# EAGLE board Jukebox (EAGLE 7.6.0)
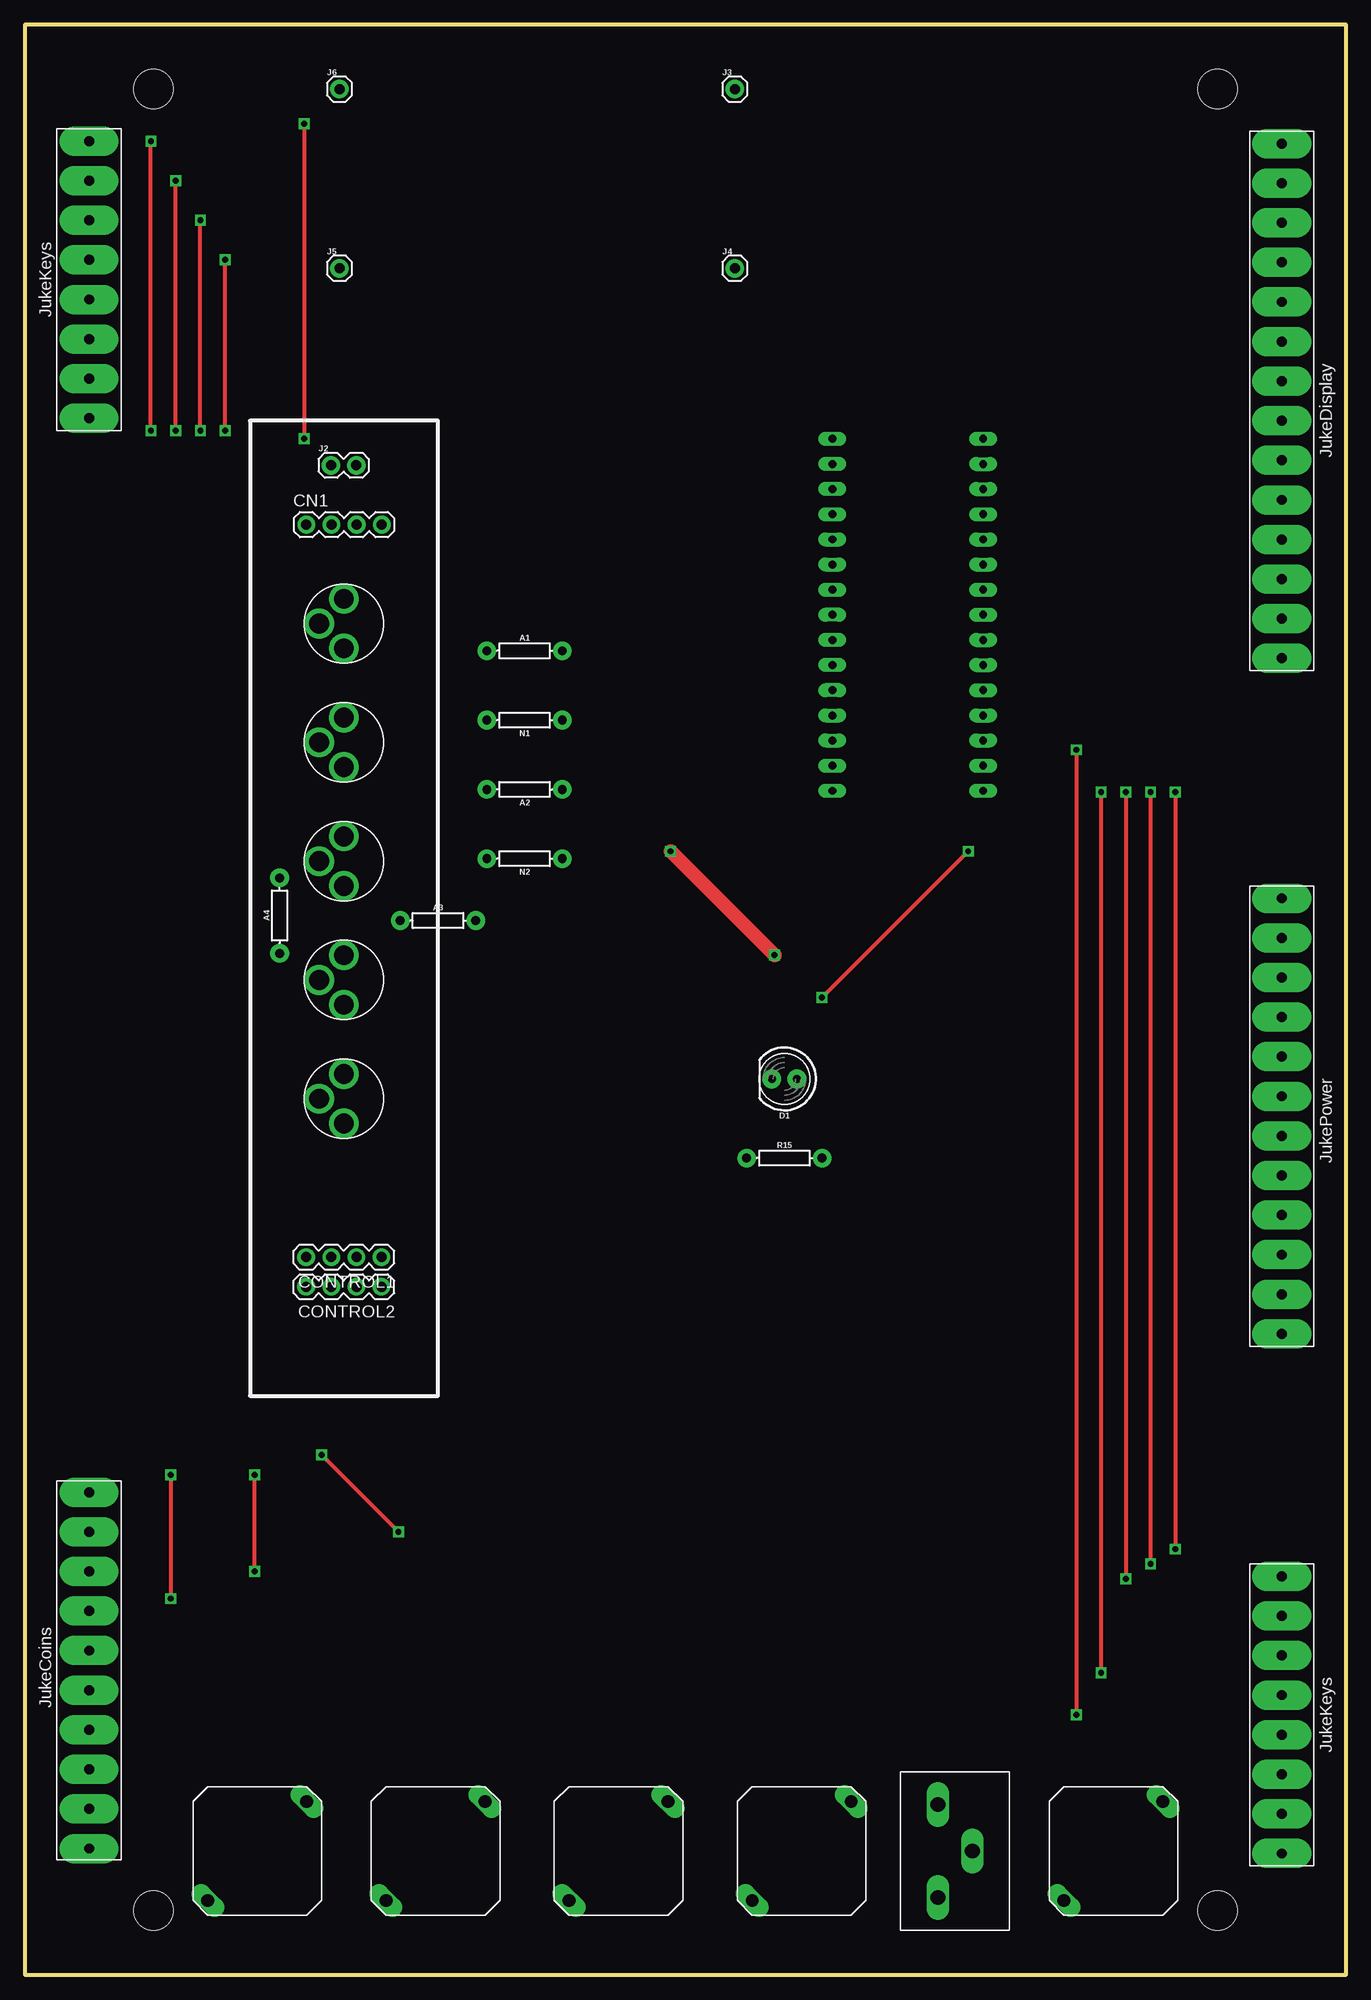
[diagram p0: board, top side]
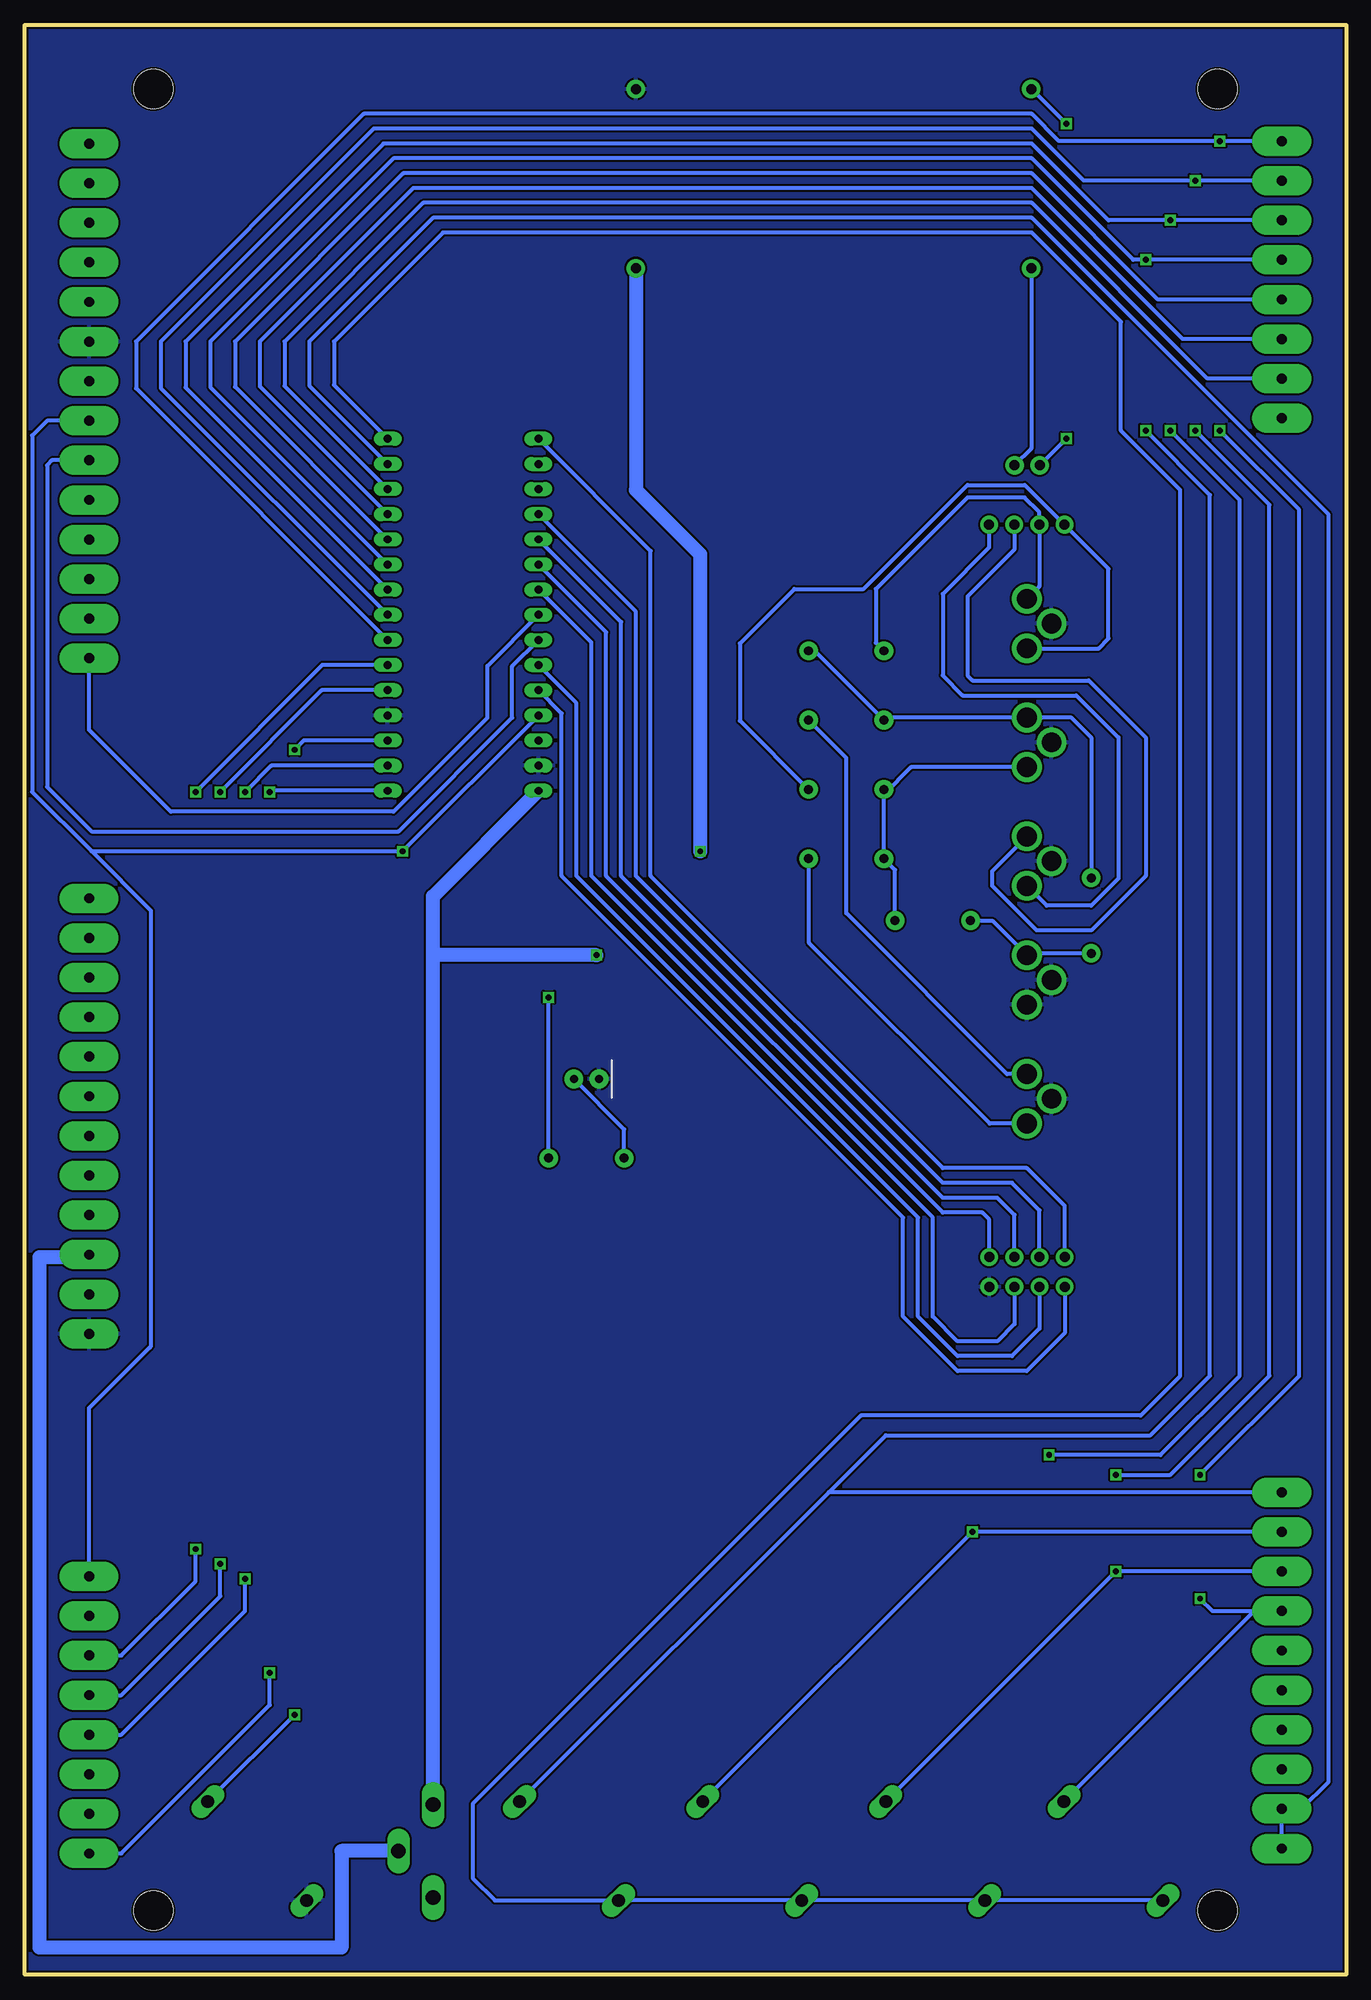
[diagram p1: board, bottom side, seen from below]

Size 133.5 x 197 mm. Coordinates in mm from the lower left corner, seen from the top.
Outline: 133.5,197 0,197 0,0 133.5,0 133.5,197
Copper layers (1*16): Top 0.035mm / dielectric 1.5mm / Bottom 0.035mm
Design rules "SparkFun": minimum track width 8mil, minimum drill 20mil, track to track 8mil, track to pad 8mil, pad to pad 8mil, via to via 8mil, smd to smd 8mil, copper to edge 8mil, drill to drill 8mil, minimum pad ring 12mil, minimum via ring 10mil, stop-mask expansion 4mil, vias tented up to drill 20mil, thermal gap 10mil
Holes 4 mm at 13,190.5 120.5,190.5 13,6.5 120.5,6.5

## Footprints (pad centres in the part's own frame; a part is rotated, then mirrored left to right if it is on the bottom)
AXIAL-0.3 = drill 0.9 pad 1.88: P$1 -3.81,0; P$2 3.81,0
JUKEHEADPHONE = drill 2 pad 3: 1 0,2.5; 2 2.5,0; 3 -2.5,0
1X04-BIG = drill 1.016 pad 1.778: 1 0,0; 2 2.54,0; 3 5.08,0; 4 7.62,0
LED_5MM = drill 0.813 pad 1.88: A -1.27,0; K 1.27,0
1X02 = drill 1.016 pad 1.88: 1 0,0; 2 2.54,0
1X01 = drill 1.016 pad 1.88: 1 0,0
NANO = drill 0.8 long: 3.3V -10.16,24.13; 5V -10.16,-1.27; A0 -10.16,19.05; A1 -10.16,16.51; A2 -10.16,13.97; A3 -10.16,11.43; A4 -10.16,8.89; A5 -10.16,6.35; A6 -10.16,3.81; A7 -10.16,1.27; AREF -10.16,21.59; D2 5.08,1.27; D3 5.08,3.81; D4 5.08,6.35; D5 5.08,8.89; D6 5.08,11.43; D7 5.08,13.97; D8 5.08,16.51; D9 5.08,19.05; D10 5.08,21.59; D11 5.08,24.13; D12 5.08,26.67; D13 -10.16,26.67; GND -10.16,-6.35; GND1 5.08,-1.27; RAW -10.16,-8.89; RST -10.16,-3.81; RST1 5.08,-3.81; RX1 5.08,-6.35; TX0 5.08,-8.89
10PINJUKE = drill 1 pad 3 long: 1 -18,0; 2 -14,0; 3 -10,0; 4 -6,0; 5 -2,0; 6 2,0; 7 6,0; 8 10,0; 9 14,0; 10 18,0
8PINJUKE = drill 1 pad 3 long: 1 -14,0; 2 -10,0; 3 -6,0; 4 -2,0; 5 2,0; 6 6,0; 7 10,0; 8 14,0
14PINJUKE = drill 1 pad 3 long: 1 -26,0; 2 -22,0; 3 -18,0; 4 -14,0; 5 -10,0; 6 -6,0; 7 -2,0; 8 2,0; 9 6,0; 10 10,0; 11 14,0; 12 18,0; 13 22,0; 14 26,0
12PINJUKE = drill 1 pad 3 long: 1 -22,0; 2 -18,0; 3 -14,0; 4 -10,0; 5 -6,0; 6 -2,0; 7 2,0; 8 6,0; 9 10,0; 10 14,0; 11 18,0; 12 22,0
JUKEBUTTON = drill 1.3 long: 1 -5,5; 2 5,-5
JUKESWITCH = drill 1.5 long: 1 -1.75,4.7; 2 -1.75,-4.7; 3 1.75,0

## Placement (x,y rotation side)
A1  1k  [AXIAL-0.3]  50.5,133.75 0 top
A2  1k  [AXIAL-0.3]  50.5,119.75 180 top
A3  1k  [AXIAL-0.3]  41.75,106.5 0 top
A4  1k  [AXIAL-0.3]  25.75,107 90 top
AUXIN  JUKEHEADPHONE  [JUKEHEADPHONE]  32.25,136.5 90 top
AUXOUT  JUKEHEADPHONE  [JUKEHEADPHONE]  32.25,124.5 90 top
CN1  1X4-BIG  [1X04-BIG]  28.45,146.5 0 top
CONTROL1  1X4-BIG  [1X04-BIG]  36.05,72.5 180 top
CONTROL2  1X4-BIG  [1X04-BIG]  36.05,69.5 180 top
D1  [LED_5MM]  76.75,90.5 180 top
FROMNEEDLE  JUKEHEADPHONE  [JUKEHEADPHONE]  32.25,88.5 90 top
J2  [1X02]  30.95,152.5 0 top
J3  [1X01]  71.75,190.5 0 top
J4  [1X01]  71.75,172.4 0 top
J5  [1X01]  31.8,172.4 0 top
J6  [1X01]  31.8,190.5 0 top
N1  1k  [AXIAL-0.3]  50.5,126.75 180 top
N2  1k  [AXIAL-0.3]  50.5,112.75 180 top
R15  10k  [AXIAL-0.3]  76.75,82.5 0 top
TOAMP  JUKEHEADPHONE  [JUKEHEADPHONE]  32.25,112.5 90 top
TOLIGHT  JUKEHEADPHONE  [JUKEHEADPHONE]  32.25,100.5 90 top
U$1  NANO  [NANO]  91.75,128.5 0 top
U$5  10PINJUKE  [10PINJUKE]  6.5,30.75 90 top
U$6  8PINJUKE  [8PINJUKE]  6.5,171.25 90 top
U$7  14PINJUKE  [14PINJUKE]  127,159 270 top
U$8  12PINJUKE  [12PINJUKE]  127,86.75 270 top
U$9  JUKEBUTTON  [JUKEBUTTON]  23.5,12.5 90 top
U$10  JUKEBUTTON  [JUKEBUTTON]  41.5,12.5 90 top
U$11  JUKEBUTTON  [JUKEBUTTON]  60,12.5 90 top
U$12  JUKEBUTTON  [JUKEBUTTON]  78.5,12.5 90 top
U$13  JUKEBUTTON  [JUKEBUTTON]  110,12.5 90 top
U$14  JUKESWITCH  [JUKESWITCH]  94,12.5 0 top
U$17  8PINJUKE2  [8PINJUKE]  127,26.25 270 top

## Library data of the parts
A1-A4 N1 N2 R15 = SparkFun-Resistors; PROD_ID: RES-12183
AUXIN AUXOUT FROMNEEDLE TOAMP TOLIGHT U$5-U$14 U$17 = Jukebox
CN1 CONTROL1 CONTROL2 = adafruit
D1 = SparkFun-LED
J2-J6 = SparkFun-Connectors
U$1 = Arduino-clone

## Nets
GND: AUXIN.1 AUXOUT.1 CONTROL2.1 D1.K FROMNEEDLE.1 J3.1 TOAMP.1 TOLIGHT.1 TOLIGHT.3 U$1.GND U$1.GND1 U$7.6 U$8.12 U$13.1
N$1: U$1.D4 U$5.7 U$6.8 U$9.2
N$2: U$1.D5 U$5.8 U$6.7 U$10.2
N$3: U$1.D6 U$5.9 U$6.6 U$11.2
N$4: U$1.D7 U$5.10 U$6.5 U$12.2
N$5: U$1.D8 U$6.4
N$6: U$1.D9 U$6.3
N$7: U$1.D10 U$6.2
N$8: U$8.10 U$14.3
N$9: U$1.RST1 U$13.2
N$10: U$1.D12 U$9.1 U$10.1 U$11.1 U$12.1
N$11: U$1.D11 U$5.1 U$5.2
N$12: U$1.A4 U$7.14
N$13: CN1.3 TOAMP.2
N$14: CN1.4 TOAMP.3
N$15: J2.2 J5.1
N$16: FROMNEEDLE.3 N2.P$1
N$17: FROMNEEDLE.2 N1.P$1
N$18: A1.P$1 AUXIN.2 CN1.2
N$19: A2.P$1 AUXIN.3 CN1.1
N$20: J2.1 J6.1
N$21: U$1.A5 U$7.9
N$22: U$1.D3 U$17.3
N$23: A2.P$2 A3.P$2 AUXOUT.3 N2.P$2
N$24: A1.P$2 A4.P$2 AUXOUT.2 N1.P$2
N$25: U$1.D2 U$17.4
N$26: CONTROL1.4 U$1.D13
N$27: R15.P$2 U$1.5V U$7.8 U$17.1
N$28: CONTROL1.3 U$1.A0
N$29: CONTROL1.2 U$1.A1
N$30: CONTROL1.1 U$1.A2
N$31: CONTROL2.4 U$1.A7
N$32: J4.1 U$1.RAW U$14.1
N$33: D1.A R15.P$1
N$34: U$1.RX1 U$17.5
N$35: CONTROL2.3 U$1.A6
N$36: CONTROL2.2 U$1.A3
N$37: U$1.TX0 U$17.8
N$38: A3.P$1 A4.P$1 TOLIGHT.2

## Tracks (layer width: path | path; a pad name or v marks a point on that pad's centre or on a via)
GND
  pour Bottom (isolate 0.406): 0,197 133.5,197 133.5,0 0,0
N$1  (via drill 0.6)
  Top 0.406: v12.75,156 v12.75,185.25 | v14.75,50.5 v14.75,38
  Bottom 0.406: U$9.2 9.25,36.75 U$5.7 13.5,36.75 v14.75,38 | U$6.8 v12.75,185.25 29,185.25 31.75,188 99.25,188 122.25,165 122.25,160.27 U$1.D4 | v12.75,156 4.75,148 4.75,60.5 v14.75,50.5
N$2  (via drill 0.6)
  Top 0.406: v23.25,40.75 v23.25,50.5 | v15.25,156 v15.25,181.25
  Bottom 0.406: U$5.8 v23.25,40.75 U$10.2 | U$6.7 v15.25,181.25 26.5,181.25 31.75,186.5 98.25,186.5 119.75,165 119.75,160.31 U$1.D5 | v15.25,156 7.75,148.5 7.75,60.5 17.75,50.5 v23.25,50.5
N$3  (via drill 0.6)
  Top 0.406: v17.75,156 v17.75,177.25 | v30,52.5 v37.75,44.75
  Bottom 0.406: U$5.9 v37.75,44.75 U$11.2 | U$6.6 v17.75,177.25 24,177.25 31.75,185 97.25,185 117.25,165 117.25,160.35 U$1.D6 | v17.75,156 10.75,149 10.75,60.5 18.75,52.5 v30,52.5
N$4  (via drill 0.6)
  Top 0.406: v20.25,156 v20.25,173.25
  Bottom 0.406: U$5.10 52.25,48.75 | 52.25,48.75 U$12.2 | U$6.5 v20.25,173.25 21.5,173.25 31.75,183.5 96.25,183.5 114.75,165 114.75,160.39 U$1.D7 | v20.25,156 13.75,149.5 13.75,60.5 19.75,54.5 46.5,54.5 52.25,48.75
N$5
  Bottom 0.406: U$6.4 19,169.25 31.75,182 95.25,182 112.25,165 112.25,160.43 U$1.D8
N$6
  Bottom 0.406: U$6.3 16.5,165.25 31.75,180.5 94.25,180.5 109.75,165 109.75,160.47 U$1.D9
N$7
  Bottom 0.406: U$6.2 14,161.25 31.75,179 93.25,179 107.25,165 107.25,160.51 U$1.D10
N$8
  Bottom 1.422: U$14.3 101.5,12.5 101.5,2.75 132,2.75 132,72.5 127,72.5 U$8.10
N$9  (via drill 0.6)
  Top 0.406: v106.25,123.75 v106.25,26.25
  Bottom 0.406: U$1.RST1 105.31,124.69 v106.25,123.75 | v106.25,26.25 U$13.2
N$10
  Bottom 0.406: U$9.1 U$10.1 U$11.1 U$12.1 86,7.5 88.25,9.75 88.25,17.25 49,56.5 20.75,56.5 16.75,60.5 16.75,150 22.75,156 22.75,167 31.75,176 91.25,176 102.25,165 102.25,160.59 U$1.D12
N$11
  Bottom 0.406: U$5.1 U$5.2 4.5,16.75 1.75,19.5 1.75,147.5 31.75,177.5 92.25,177.5 104.75,165 104.75,160.55 U$1.D11
N$12
  Bottom 0.406: U$1.A4 86.75,132.23 86.75,127 96.25,117.5 118.75,117.5 127,125.75 U$7.14
N$13
  Bottom 0.406: CN1.3 33.53,143.97 38.25,139.25 38.25,131.25 37.75,130.75 26,130.75 20.25,125 20.25,111 25.75,105.5 31.25,105.5 35.75,110 35.75,111.5 TOAMP.2
N$14
  Bottom 0.406: CN1.4 36.07,144.18 40.75,139.5 40.75,131.25 38.75,129.25 27.25,129.25 23,125 23,110.75 25.75,108 30.25,108 TOAMP.3
N$15
  Bottom 0.406: J5.1 31.8,154.19 J2.2
N$16
  Bottom 0.406: FROMNEEDLE.3 36,86 54.25,104.25 54.25,112.69 N2.P$1
N$17
  Bottom 0.406: FROMNEEDLE.2 34.25,91 50.5,107.25 50.5,122.94 N1.P$1
N$18
  Bottom 0.406: AUXIN.2 30.99,140.26 CN1.2 30.99,147.74 32.5,149.25 38.25,149.25 47.5,140 47.5,134.56 A1.P$1
N$19
  Bottom 0.406: CN1.1 32.45,150.5 38.25,150.5 48.75,140 55.75,140 61.25,134.5 61.25,126.69 A2.P$1 | CN1.1 28.25,146.5 | AUXIN.3 25,134 24,135 24,142.05 CN1.1
N$20  (via drill 0.6)
  Top 0.406: v28.25,187 v28.25,155.2
  Bottom 0.406: J6.1 31.75,190.5 v28.25,187 | v28.25,155.2 J2.1
N$21
  Bottom 0.406: U$7.9 130.75,153 131.25,152.5 131.25,120 126.75,115.5 95.75,115.5 84.25,127 84.25,132.19 U$1.A5
N$22  (via drill 0.6)
  Top 0.406: v116.25,119.5 v116.25,43
  Bottom 0.406: U$1.D3 103.44,132.31 v116.25,119.5 | U$17.3 123.75,32.25 116.25,39.75 v116.25,43
N$23
  Bottom 0.406: 46.69,119.25 N2.P$2 45.56,111.62 A3.P$2 | 46.69,119.25 A2.P$2 | AUXOUT.3 43.94,122 46.69,119.25
N$24
  Bottom 0.406: A1.P$2 53.69,133.75 N1.P$2 46.44,127 AUXOUT.2 27.75,127 25.75,125 A4.P$2
N$25  (via drill 0.6)
  Top 0.406: v113.75,119.5 v113.75,41.5
  Bottom 0.406: U$1.D2 103.48,129.77 v113.75,119.5 | U$17.4 123.75,28.25 113.75,38.25 v113.75,41.5
N$26
  Bottom 0.406: CONTROL1.4 28.43,77.68 32.25,81.5 40.75,81.5 70.25,111 70.25,143.83 U$1.D13
N$27  (via drill 0.6)
  Top 0.406: v80.56,98.74 v95.32,113.5
  Bottom 0.406: U$7.8 131.25,157 132.75,155.5 132.75,119.5 126.75,113.5 | 126.75,113.5 v95.32,113.5 U$1.5V | U$17.1 127,57.25 120.88,63.38 120.75,63.5 120.75,107.5 126.75,113.5 | R15.P$2 v80.56,98.74
N$28
  Bottom 0.406: CONTROL1.3 30.97,77.22 33.75,80 40.75,80 71.75,111 71.75,137.71 U$1.A0
N$29
  Bottom 0.406: CONTROL1.2 33.51,76.76 35.25,78.5 40.75,78.5 73.25,111 73.25,136.67 U$1.A1
N$30
  Bottom 0.406: CONTROL1.1 36.05,76.3 36.75,77 40.75,77 74.75,111 74.75,135.63 U$1.A2
N$31
  Bottom 0.406: CONTROL2.4 28.43,64.82 32.25,61 39.25,61 44.75,66.5 44.75,76.5 79.25,111 79.25,127.43 U$1.A7
N$32  (via drill 0.6)
  Top 1.422: v65.25,113.5 v75.75,103
  Bottom 1.422: U$14.1 92.25,103 | 92.25,103 92.25,108.95 U$1.RAW | J4.1 71.75,150 65.25,143.5 v65.25,113.5 | v75.75,103 92.25,103
N$33
  Bottom 0.406: R15.P$1 72.94,85.42 D1.A
N$34  (via drill 0.6)
  Top 0.406: v111.25,119.5 v111.25,40
  Bottom 0.406: U$1.RX1 108.6,122.15 v111.25,119.5 | U$17.5 123.75,24.25 111.25,36.75 v111.25,40
N$35
  Bottom 0.406: CONTROL2.3 30.97,65.28 33.75,62.5 39.25,62.5 43.25,66.5 43.25,76.5 77.75,111 77.75,128.47 U$1.A6
N$36
  Bottom 0.406: CONTROL2.2 33.51,65.74 35.25,64 39.25,64 41.75,66.5 41.75,76.5 76.25,111 76.25,134.59 U$1.A3
N$37  (via drill 0.6)
  Top 0.406: v108.75,119.5 v108.75,30.5
  Bottom 0.406: U$1.TX0 108.64,119.61 v108.75,119.5 | U$17.8 123.75,12.25 108.75,27.25 v108.75,30.5
N$38
  Bottom 0.406: A3.P$1 35.75,106.5 TOLIGHT.2 32.25,103.19 A4.P$1
NOTGROUND
  pour Bottom: 0,197 133.5,197 133.5,0 0,0